# Altium PCB Bus_Board.PcbDoc
Units mil, origin at the board's own origin, x right, y up, seen from the top; angles counter-clockwise.
Board outline 1250 x 1000 mil, 2 copper layers (Top Layer, Bottom Layer); 5 components, 22 nets, 74 pads, 10 vias.
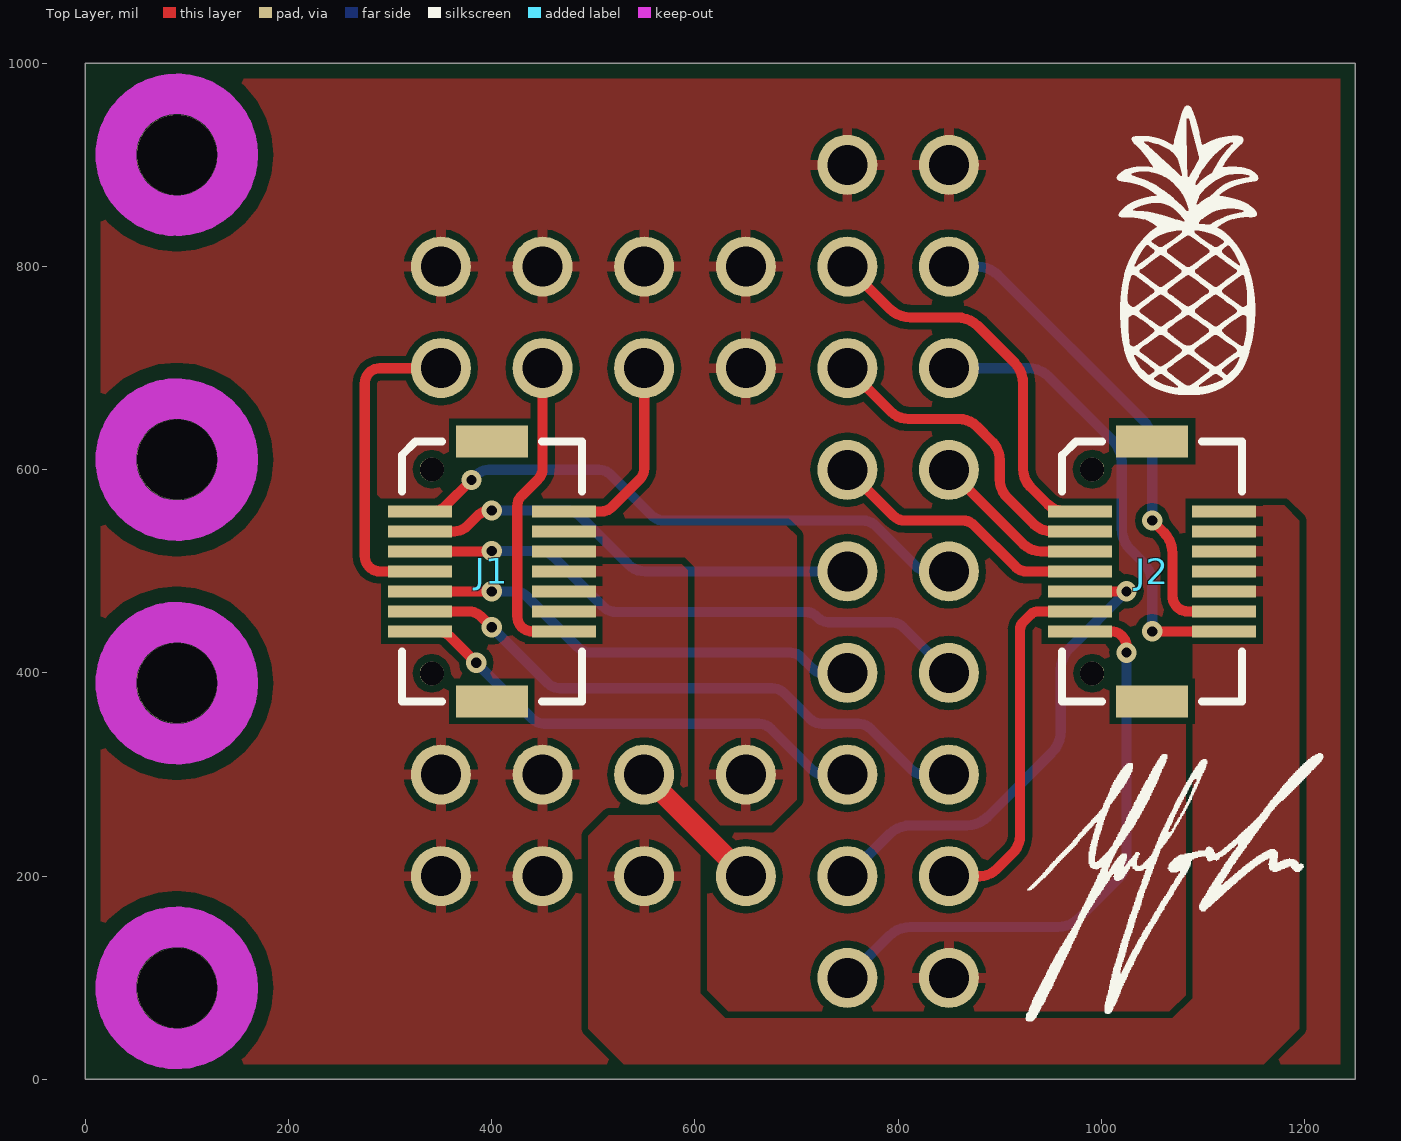
[diagram p0: Top Layer view]
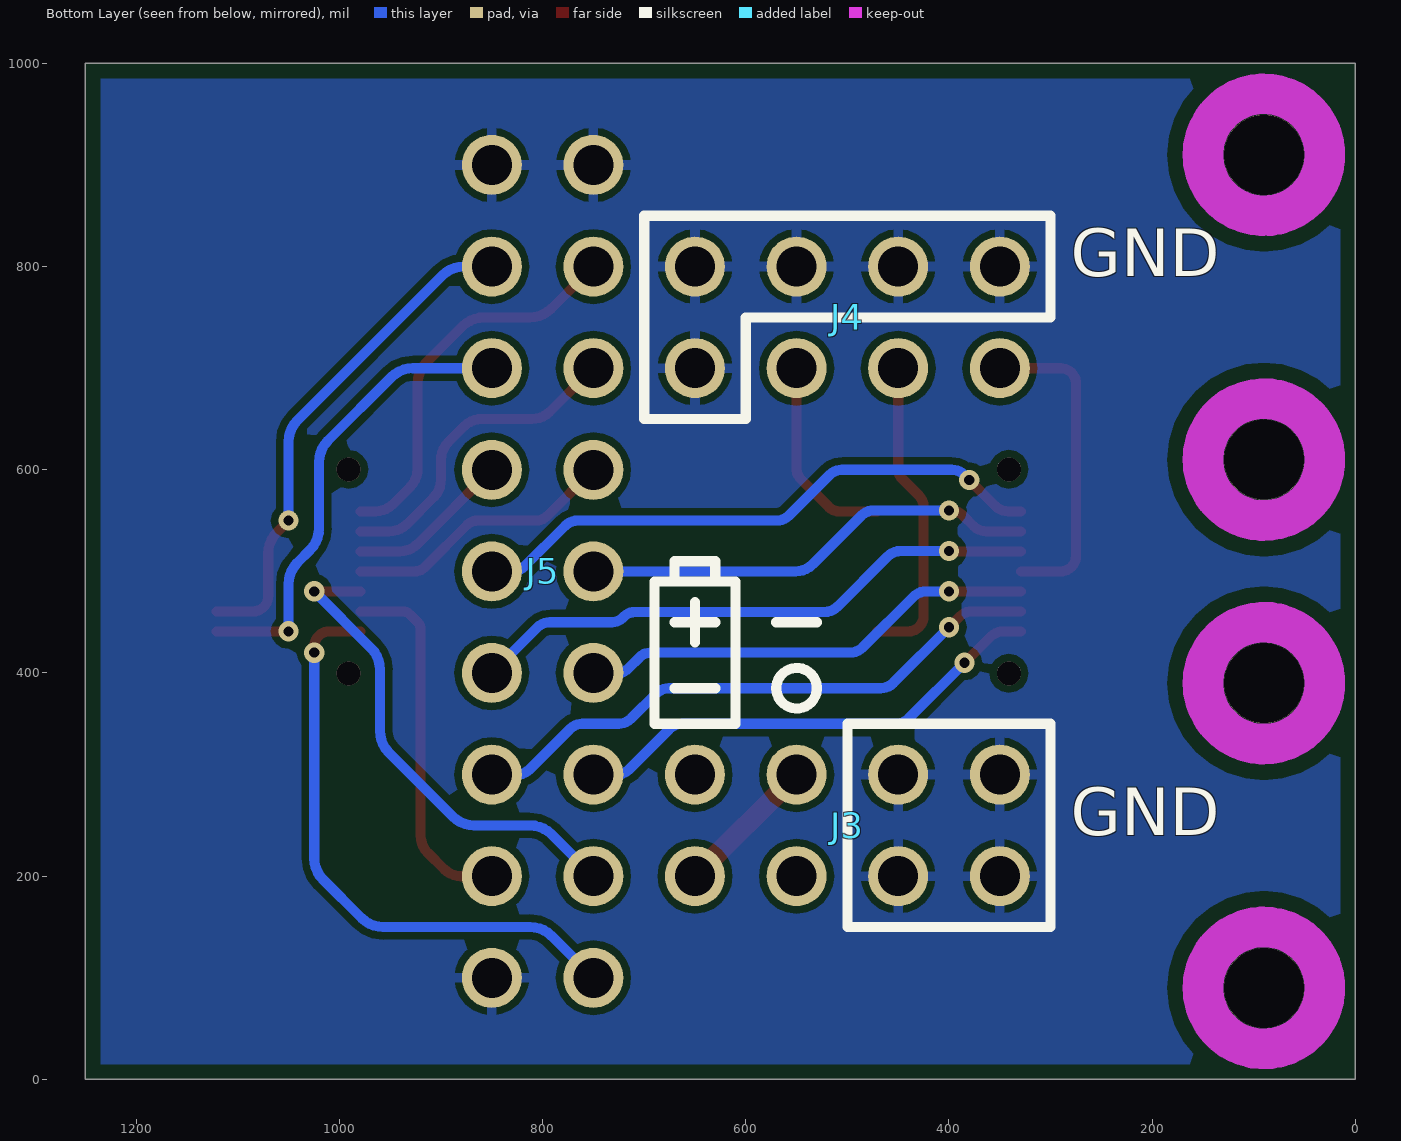
[diagram p1: Bottom Layer view, seen from below]
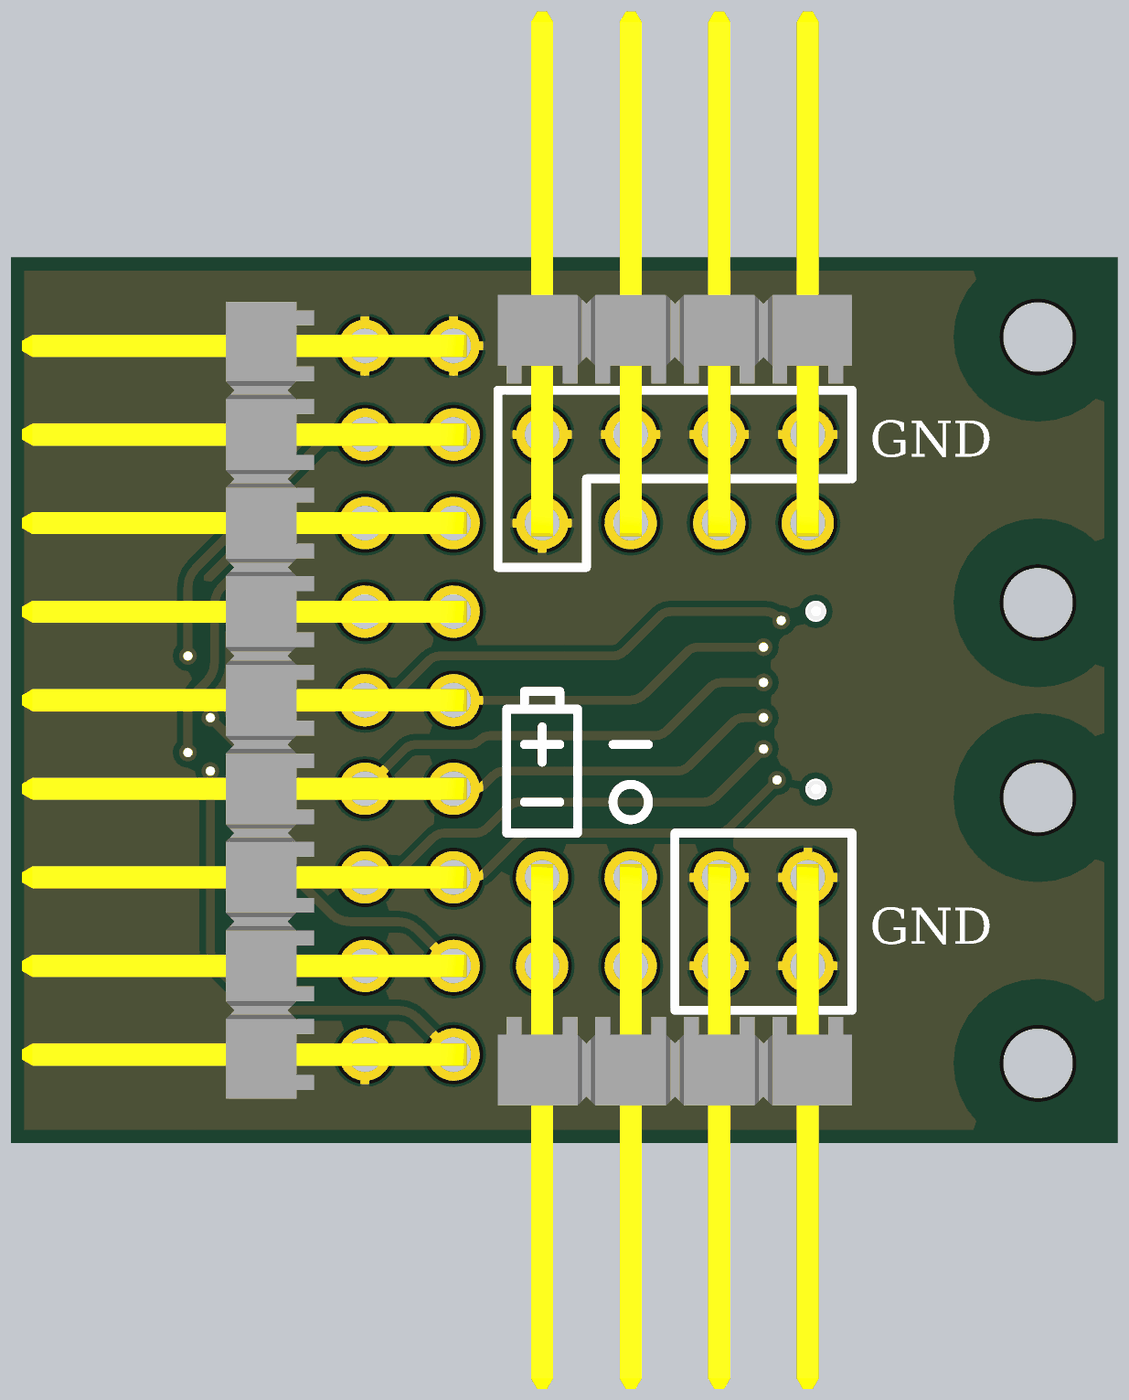
[diagram p2: 3D render of the assembled board from below, using the file's embedded part models]

## Layer stack, top to bottom
Top Solder: solder mask 0.4, Solder Resist, Dk 3.5
Top Layer: signal copper 1.4
Dielectric 1: dielectric 12.6, FR-4, Dk 4.8
Bottom Layer: signal copper 1.4
Bottom Solder: solder mask 0.4, Solder Resist, Dk 3.5

## Board outline
0,0 1250,0 1250,1000 0,1000

## Design rules (kind name [scope] priority, off if disabled: settings)
Clearance "Keepout Clearance" [(ObjectKind = 'Arc') And (Keepout = 'True')] p1: gap=7 ignorepadtopadclearanceinfootprint=FALSE except(0: Arc-Arc Arc-Track Arc-SMDPad Arc-THPad Arc-Via Arc-Fill Arc-Region Arc-Text Arc-Hole Track-Hole SMDPad-Hole THPad-Hole Via-Hole Fill-Hole Poly-Hole Region-Hole Text-Hole; 15: Arc-Poly)
Clearance [All] p2: gap=7 ignorepadtopadclearanceinfootprint=FALSE except(0: Arc-Hole Track-Hole SMDPad-Hole THPad-Hole Via-Hole Fill-Hole Poly-Hole Region-Hole Text-Hole)
ComponentClearance BigThroughHoleClearance [InComponent('J5')] p2: gap=0 collisioncheckmode=3 verticalgap=10 showdistances=FALSE
PolygonConnect [All] p1: connectstyle=Relief reliefconductorwidth=10 reliefentries=4 polygonreliefangle="90 Angle" airgapwidth=7
RoutingVias [All] p1: holewidth=20 width=20 viastyle="Through Hole" minholewidth=10 minwidth=20 maxholewidth=10 maxwidth=40
SolderMaskExpansion [All] p1: expansion=4
Width [All] p1: maxlimit=20 minlimit=10 preferedwidth=10
30 further rules are at their usual default settings.

## Components (designator, comment, footprint, x,y, rotation, side; value= is the part's Value field where it differs from the comment)
J1 "CONN HEADER 14POS" DF12(3.0)-14DP 400,500 r90 top
J2 "CONN HEADER 14POS" DF12(3.0)-14DP 1050,500 r90 top
J3 "CONN HEADER R/A 8POS 2.54MM" "CONN HEADER R/A 8POS 2.54MM" 650,300 r180 bottom
J4 "CONN HEADER R/A 8POS 2.54MM" "CONN HEADER R/A 8POS 2.54MM" 350,700 r0 bottom
J5 "CONN HEADER R/A 18POS 2.54MM" "CONN HEADER R/A 18POS 2.54MM" 750,900 r270 bottom

## Footprints (in the part's own frame and the unit in brackets; to place one, negate y for a bottom-side part, rotate by r counter-clockwise, add the part's x,y. Pads: shape width x height; smd on the part's side, far side on the other; paste and mask are expansions set on the pad)
"CONN HEADER R/A 8POS 2.54MM" [mm] "Connector Header Through Hole, Right Angle 8 position 0.100\" (2.54mm)"
  round 1.5 hole 1: 1(0,0) 2(2.54,0) 3(5.08,0) 4(7.62,0) 5(7.62,-2.54) 6(5.08,-2.54) 7(2.54,-2.54) 8(0,-2.54)
  body extent -1.27,-14.67 8.89,0.38, height 5.54
"CONN HEADER R/A 18POS 2.54MM" [mm] "Connector Header Through Hole, Right Angle 18 position 0.100\" (2.54mm)"
  round 1.5 hole 1: 1(0,0) 2(2.54,0) 3(5.08,0) 4(7.62,0) 5(10.16,0) 6(12.7,0) 7(15.24,0) 8(17.78,0) 9(20.32,0) 10(20.32,-2.54) 11(17.78,-2.54) 12(15.24,-2.54) 13(12.7,-2.54) 14(10.16,-2.54) 15(7.62,-2.54) 16(5.08,-2.54) 17(2.54,-2.54) 18(0,-2.54)
  body extent -1.27,-12.38 21.59,0.38, height 5.54
DF12(3.0)-14DP [mm] "CONN HEADER 14POS 3MM SMD 0.5MM"
  rect 0.3x1.6 smd mask+0.051: 1(1.5,1.8) 2(1,1.8) 3(0.5,1.8) 4(0,1.8) 5(-0.5,1.8) 6(-1,1.8) 7(-1.5,1.8) 8(-1.5,-1.8) 9(-1,-1.8) 10(-0.5,-1.8) 11(0,-1.8) 12(0.5,-1.8) 13(1,-1.8) 14(1.5,-1.8)
  rect 0.8x1.8 smd mask+0.102: ""(-3.25,0)
  round 0.6 hole 0.6 unplated mask+0: ""(-2.55,1.5) ""(2.55,1.5)
  rect 0.8x1.8 smd: ""(3.25,0)
  Multi-Layer region: -4,1
  silkscreen extent -3.25,-2.25 3.25,2.25, body extent -3.3,-2.29 3.3,2.31, height 2.29

## Part data
J1 J2: library part DF12(3.0)-14DP-0.5V(86), "14 Position Connector Header, Outer Shroud Contacts Surface Mount Gold", Digikey Part Number=H11701CT-ND, Manufacturer=Hirose
J3 J4: "Connector Header Through Hole, Right Angle 8 position 0.100\" (2.54mm)", Digikey Part Number=SAM12315-ND, Manufacturer="Samtec Inc."
J5: "Connector Header Through Hole, Right Angle 18 position 0.100\" (2.54mm)", Digikey Part Number=SAM1041-09-ND, Manufacturer="Samtec Inc."

## Free pads (board coordinates)
  round 78.74 hole 78.74 unplated: ""(90,90) ""(90,390) ""(90,610) ""(90,910)

## Via types
v1: diameter 20, hole 10, Top Layer to Bottom Layer, tented both sides, 10 vias

## Nets (pads, with @x,y where several pads share a name; then routed paths per layer and width w, separated by ;. In a path a pad name is that pad's centre, name@x,y a point inside that pad or via, vN(x,y) a via of type N, cw(c..) or ccw(c..) an arc to the next point about the centre after c; other vN are vias at no path point)
BASS_A: J2.1 J5.2 | length 385.4
  Top Layer w10: J5.2 791.21,758.79 ccw(c812.43,780) 812.43,750 857.57,750 cw(c857.57,720) 878.79,741.21 914.21,705.79 cw(c892.99,684.58) 922.99,684.58 922.99,600.67 ccw(c947.99,600.67) 930.32,582.99 946.93,566.38 ccw(c964.61,584.06) 964.61,559.06 J2.1
BASS_B: J2.8 J5.16 | length 460.3
  Top Layer w10: v1(1050,440.94) J2.8
  Bottom Layer w10: J5.16 927.57,700 cw(c927.57,670) 948.79,691.21 1011.21,628.79 cw(c990,607.57) 1020,607.57 1020,542.43 ccw(c1050,542.43) 1028.79,521.21 1041.21,508.79 cw(c1020,487.57) 1050,487.57 v1(1050,440.94)
BASS_W: J2.9 J5.17 | length 494.5
  Top Layer w10: v1(1050,550) 1061.21,538.79 cw(c1040,517.57) 1070,517.57 1070,475.63 ccw(c1085,475.63) 1085,460.63 J2.9
  Bottom Layer w10: J5.17 877.57,800 cw(c877.57,770) 898.79,791.21 1041.21,648.79 cw(c1020,627.57) 1050,627.57 v1(1050,550)
BAT-: J3.2 J3.8 | length 141.4
  Top Layer w20: J3.2 J3.8
BRDG_PUP_OUT: J1.14 J4.3 | length 197.7
  Top Layer w10: J1.14 507.84,559.06 ccw(c507.84,574.06) 518.44,563.44 545.61,590.61 ccw(c535,601.21) 550,601.21 J4.3
BRDG_SW_IN1: J1.1 J5.14 | length 574.6
  Top Layer w10: J1.1 341.6,559.06 ccw(c341.6,577.06) 354.33,564.33 v1(380,590)
  Bottom Layer w10: v1(380,590) 384.73,594.73 cw(c397.46,582) 397.46,600 504.97,600 cw(c504.97,582) 517.7,594.73 557.15,555.27 ccw(c569.88,568) 569.88,550 765.22,550 cw(c765.22,532) 777.95,544.73 817.41,505.27 ccw(c830.13,518) 830.13,500 J5.14
BRDG_SW_IN2: J1.3 J5.13 | length 567.1
  Top Layer w10: J1.3 399.69,519.68 v1(400,520)
  Bottom Layer w10: v1(400,520) 447.54,520 cw(c447.54,502) 460.27,514.73 509.73,465.27 ccw(c522.46,478) 522.46,460 709.24,460 cw(c709.24,445) 719.84,455.61 721.06,454.39 ccw(c731.67,465) 731.67,450 792.54,450 cw(c792.54,432) 805.27,444.73 J5.13
BRDG_SW_OUT: J1.2 J5.5 | length 450.9
  Top Layer w10: J1.2 363.06,539.37 ccw(c363.06,557.37) 375.79,544.64 385.88,554.73 cw(c398.61,542) 398.61,560 v1(400,560)
  Bottom Layer w10: v1(400,560) 473.76,560 cw(c473.76,542) 486.49,554.73 534.18,507.03 ccw(c551.15,524) 551.15,500 J5.5
GND: J1.9 J1.10 J1.11 J3.3 J3.4 J3.5 J3.6 J4.4 J4.5 J4.6 J4.7 J4.8 J5.1 J5.10 J5.18
NECK_PUP_OUT: J1.8 J4.2 | length 307.6
  Top Layer w10: J4.2 450,601.21 cw(c435,601.21) 445.61,590.61 429.39,574.39 ccw(c440,563.79) 425,563.79 425,455.94 ccw(c440,455.94) 440,440.94 J1.8
NECK_SW_IN1: J1.6 J5.12 | length 582.8
  Top Layer w10: J1.6 376.91,460.63 cw(c376.91,442.63) 389.64,455.36 v1(400,445)
  Bottom Layer w10: v1(400,445) 454.73,390.27 ccw(c467.46,403) 467.46,385 675.54,385 cw(c675.54,367) 688.27,379.73 712.73,355.27 ccw(c725.46,368) 725.46,350 760.49,350 cw(c760.49,332) 773.22,344.73 812.68,305.27 ccw(c825.41,318) 825.41,300 J5.12
NECK_SW_IN2: J1.5 J5.6 | length 451.3
  Top Layer w10: J1.5 v1(400,480.31)
  Bottom Layer w10: v1(400,480.31) 422.23,480.31 cw(c422.23,462.31) 434.96,475.04 484.73,425.27 ccw(c497.46,438) 497.46,420 693.79,420 cw(c693.79,405) 704.39,415.61 715.61,404.39 ccw(c726.21,415) 726.21,400 J5.6
NECK_SW_OUT: J1.7 J5.7 | length 476.1
  Top Layer w10: J1.7 346.33,440.94 cw(c346.33,422.94) 359.06,435.67 v1(384.73,410)
  Bottom Layer w10: v1(384.73,410) 439.46,355.27 ccw(c452.18,368) 452.18,350 662.54,350 cw(c662.54,332) 675.27,344.73 714.73,305.27 ccw(c727.46,318) 727.46,300 J5.7
PUP_SEL_OUT: J1.4 J4.1 | length 316.3
  Top Layer w10: J1.4 290,500 cw(c290,515) 275,515 275,685 cw(c290,685) 290,700 J4.1
TREB_A: J2.2 J5.3 | length 313.7
  Top Layer w10: J5.3 792.68,657.32 ccw(c810.36,675) 810.36,650 859.64,650 cw(c859.64,625) 877.32,642.68 892.68,627.32 cw(c875,609.64) 900,609.64 900,590.36 ccw(c925,590.36) 907.32,572.68 933.31,546.69 ccw(c950.99,564.37) 950.99,539.37 J2.2
TREB_B: J2.4 J5.4 | length 268.6
  Top Layer w10: J5.4 795.61,554.39 ccw(c806.21,565) 806.21,550 863.79,550 cw(c863.79,535) 874.39,545.61 915.61,504.39 ccw(c926.21,515) 926.21,500 J2.4
TREB_W: J2.3 J5.15 | length 161.3
  Top Layer w10: J5.15 922.99,527.01 ccw(c940.67,544.68) 940.67,519.68 J2.3
TS_OUT: J2.10 J2.11 J2.12 J2.13 J2.14 J3.7
VBAT: J1.12 J1.13 J3.1
VOL_A: J2.5 J5.8 | length 481.1
  Top Layer w10: J2.5 v1(1024.68,480.31)
  Bottom Layer w10: J5.8 791.21,241.21 cw(c812.43,220) 812.43,250 867.22,250 ccw(c867.22,280) 888.43,258.79 951.21,321.57 ccw(c930,342.78) 960,342.78 960,403.2 cw(c990,403.2) 968.79,424.42 v1(1024.68,480.31)
VOL_B: J2.7 J5.9 | length 589.2
  Top Layer w10: J2.7 1009.68,440.94 cw(c1009.68,425.94) 1024.68,425.94 v1(1024.68,420)
  Bottom Layer w10: J5.9 791.21,141.21 cw(c812.43,120) 812.43,150 956.94,150 ccw(c956.94,180) 978.16,158.79 1015.9,196.53 ccw(c994.68,217.74) 1024.68,217.74 v1(1024.68,420)
VOL_W: J2.6 J5.11 | length 361.3
  Top Layer w10: J5.11 880.06,200 ccw(c880.06,224) 897.03,207.03 912.97,222.97 ccw(c896,239.94) 920,239.94 920,442.87 cw(c930,442.87) 922.93,449.94 930.69,457.7 cw(c937.76,450.63) 937.76,460.63 J2.6
pads on no net: J1. J2.

## Polygon pours and split planes (outlines as drawn)
GND on Top Layer "GND_TOP" (solid, remove dead copper, pour order 6): 15,985 1235,985 1235,15 15,15
TS_OUT on Top Layer "TS_OUT_TOP" (solid, pour order 4): 1090,565 1180,565 1195,550 1195,50 1160,15 530,15 495,50 495,240 515,260 605,260 605,85 630,60 1070,60 1090,80
no net on Top Layer "TOP_GND" (solid, pour order 2): 1090,475
VBAT on Top Layer "TOP_VBAT" (solid, pour order 0): 439,545 690,545 700,535 700,275 675,250 625,250 600,275 600,504 590,514 439,514
GND on Bottom Layer "BOTTOM_GND" (solid, remove dead copper, pour order 8): 15,985 1235,985 1235,15 15,15

## Keep-outs
Top Layer:
  circle w40: c90,910 r60
  circle w40: c90,610 r60
  circle w40: c90,390 r60
  circle w40: c90,90 r60
Bottom Layer:
  circle w40: c90,90 r60
  circle w40: c90,390 r60
  circle w40: c90,610 r60
  circle w40: c90,910 r60

## Silkscreen, mask and mechanical layers (free items; w line width, h text height)
Top Overlay:
  drawing of 2 lines, arcs and shapes, not listed
Bottom Overlay:
  circle w10: c550,385 r20
  lines w10: 530,450 570,450 ; 630,385 670,385 ; 630,450 670,450 ; 630,490 630,510 670,510 670,490 ; 650,430 650,470 ; 300,150 300,350 500,350 500,150 300,150 ; 300,750 300,850 690,850 700,850 700,650 600,650 600,750 300,750 ; 610,350 610,490 690,490 690,350 610,350
  text "GND" at 280,775 h80
  text "GND" at 280,225 h80
Outline:
  the board outline again, w10